# Altium PCB 机器人控制板.PcbDoc
Units mm, origin at the board's own origin, x right, y up, seen from the top; angles counter-clockwise.
Board outline 50.29 x 70.23 mm, 2 copper layers (Top Layer, Bottom Layer); 25 components, 46 nets, 122 pads, 0 vias.
Unrouted connection lines stored in the file: 4.
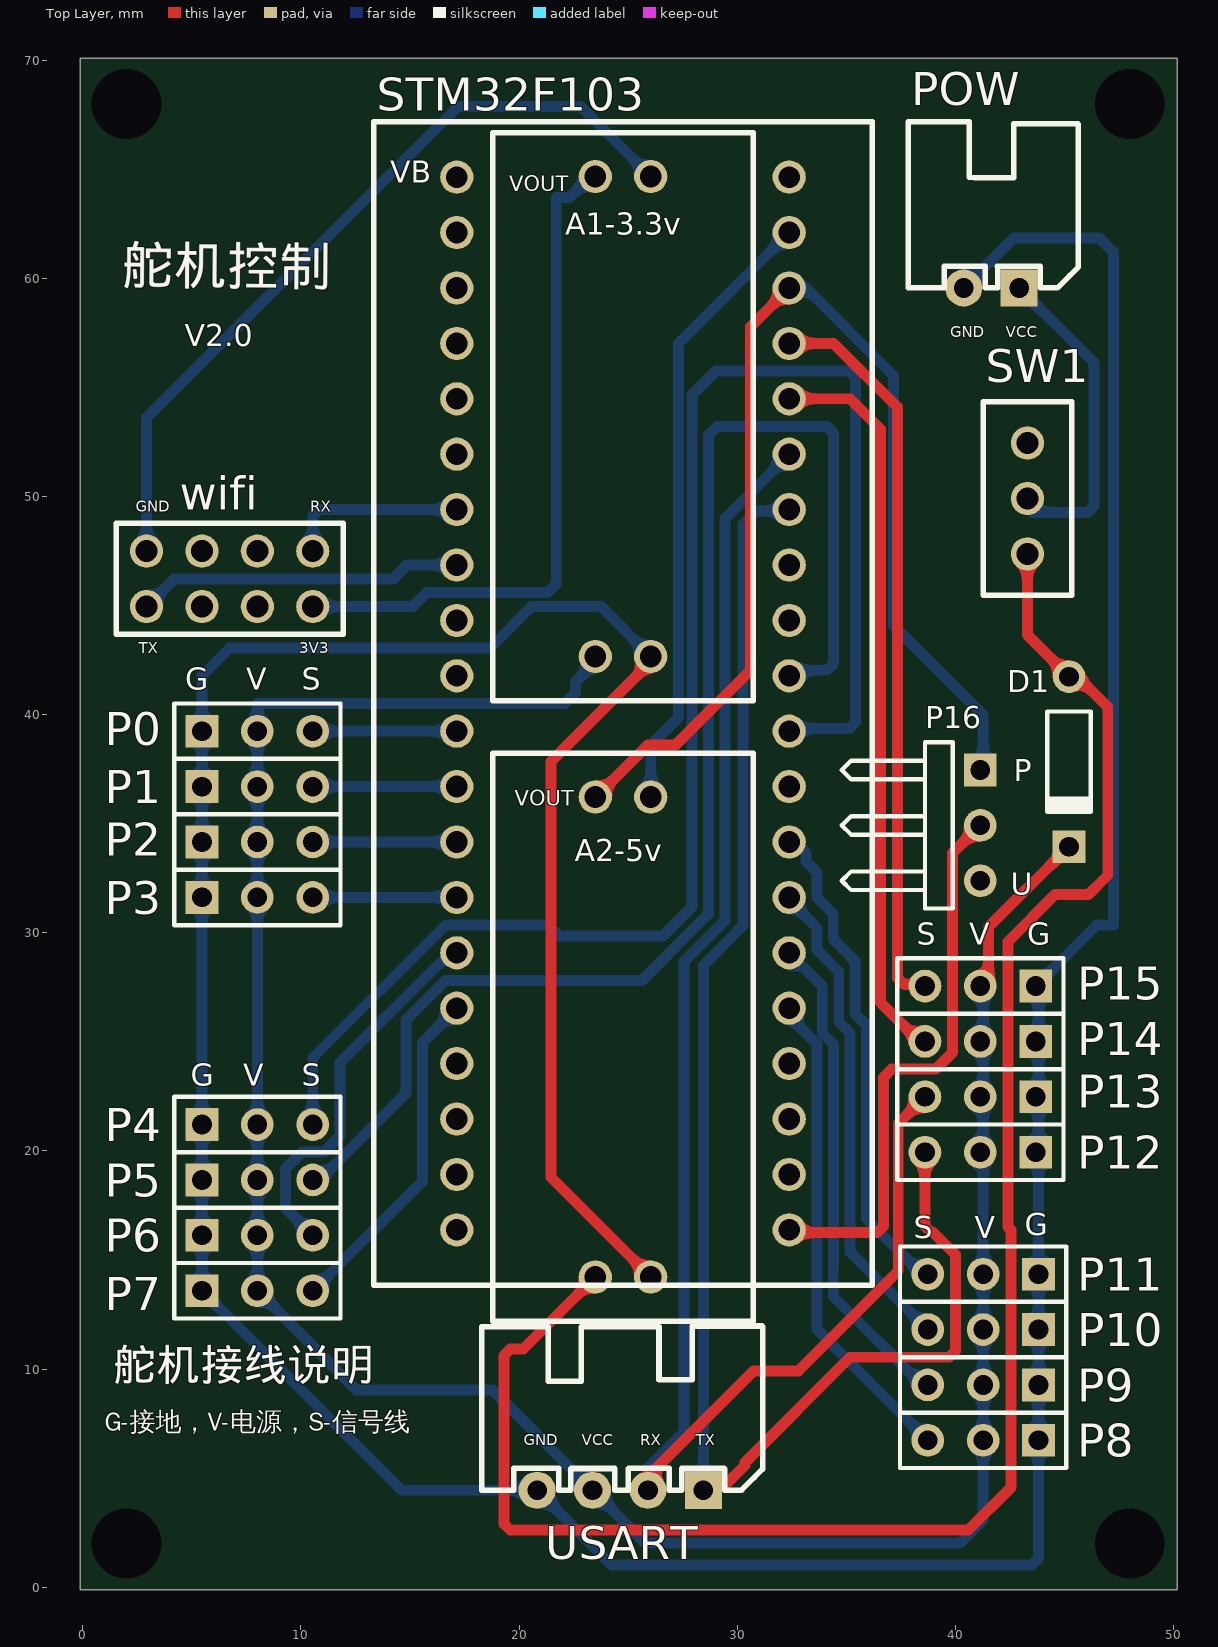
[diagram p0: Top Layer view]
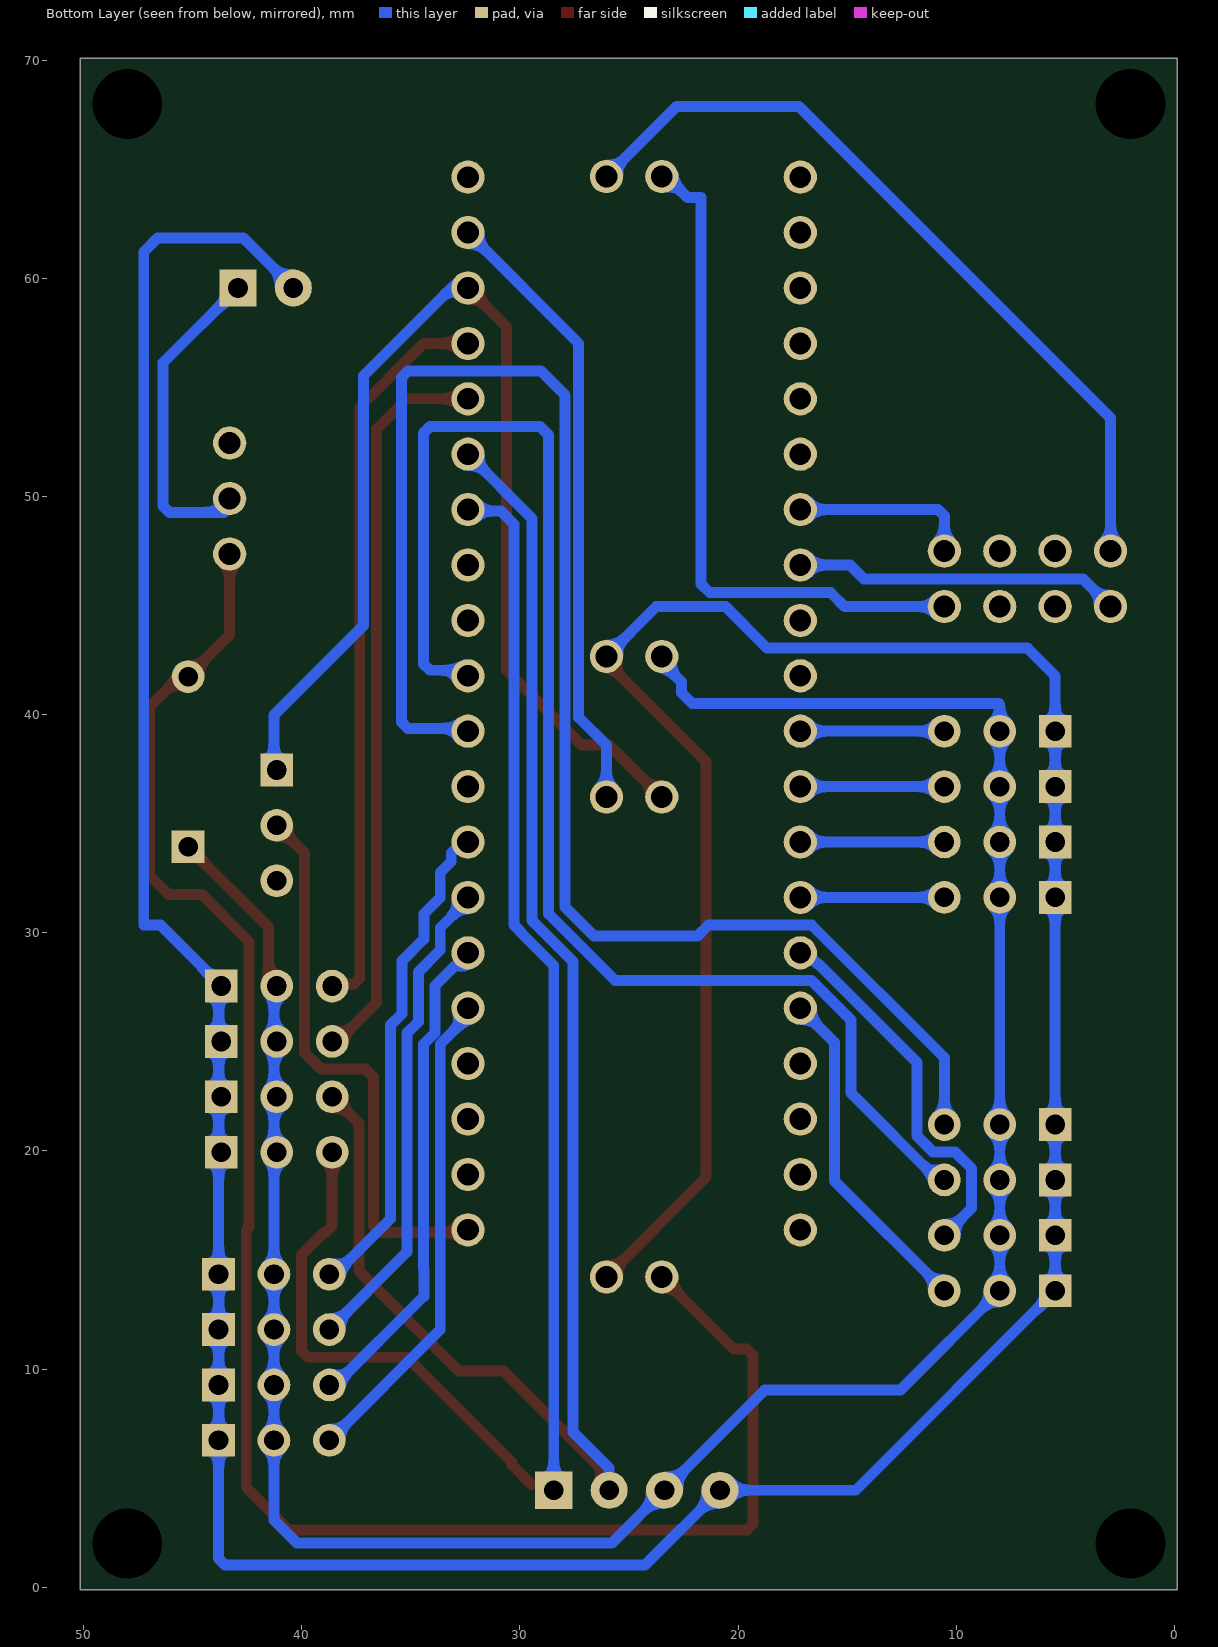
[diagram p1: Bottom Layer view, seen from below]

## Layer stack, top to bottom
Top Solder: solder mask 0.0102, Solder Resist, Dk 3.5
Top Layer: signal copper 0.0356
Dielectric 1: dielectric 0.32, FR-4, Dk 4.8
Bottom Layer: signal copper 0.0356
Bottom Solder: solder mask 0.0102, Solder Resist, Dk 3.5

## Board outline
-0.127,70.104 50.165,70.104 50.165,-0.127 -0.127,-0.127

## Design rules (kind name [scope] priority, off if disabled: settings)
Clearance [All] p1: gap=0 ignorepadtopadclearanceinfootprint=FALSE
ComponentClearance [All] p1: gap=0.1 collisioncheckmode=3 verticalgap=0 showdistances=FALSE
HoleSize [All] p1: absolutevalues=TRUE maxlimit=2.5 minlimit=0.025 maxpercent=80.000 minpercent=20.000
MinimumSolderMaskSliver [All] p1: minsoldermaskwidth=0.127
PolygonConnect [All] p1: connectstyle=Direct reliefconductorwidth=0.254 reliefentries=4 polygonreliefangle="90 Angle" airgapwidth=0.254
RoutingVias [All] p1: holewidth=0.711 width=1.27 viastyle="Through Hole" minholewidth=0.711 minwidth=0.1 maxholewidth=0.711 maxwidth=0.5
SilkToSilkClearance [All] p1: silktosilkclearance=0
SilkToSolderMaskClearance [IsPad] p1: minsilkscreentomaskgap=0 clearancetoexposedcopper=TRUE
SolderMaskExpansion [All] p1: expansion=0.102 istentingtop=FALSE
Width [All] p1: maxlimit=2 minlimit=0.1 preferedwidth=0.5
25 further rules are at their usual default settings.

## Classes and differential pairs
component class 语音控制: LD3322? RELAY? STM?
component class 红外遥控接收器: IR1 JQ8900 RELAY1 STM?
component class 火灾预警系统: FLAMESENSOR? JQ8900? OLED_0.96? RELAY? STM?
component class 人体感应风扇: BODY? RELAY? STM?
component class 机器人控制板: A1-3.3v A2-5v P0 P1 P2 P3 P4 P5 P7 P8 P9 P10 P11 P12 P13 P14 P15 P16 POW SW1 wifi

## Components (designator, comment, footprint, x,y, rotation, side; value= is the part's Value field where it differs from the comment)
A1-3.3v "AMSN17" AMSN17 26.035,42.672 r90 top (schematic designator A1)
A2-5v "AMSN17-5V" AMSN17 26.035,14.224 r90 top (schematic designator A2)
D1 "Diode 1N4738" DO-35A 45.212,37.846 r270 top
P0 "0号舵机" HDR1X3 5.461,39.243 r0 top
P1 "1号舵机" HDR1X3 5.461,36.703 r0 top
P2 "2号舵机" HDR1X3 5.461,34.163 r0 top
P3 "3号舵机" HDR1X3 5.461,31.623 r0 top
P4 "4号舵机" HDR1X3 5.461,21.209 r0 top
P5 "5号舵机" HDR1X3 5.461,18.669 r0 top
P6 "6号舵机" HDR1X3 5.461,16.129 r0 top
P7 "7号舵机" HDR1X3 5.461,13.589 r0 top
P8 "8号舵机" HDR1X3 43.815,6.731 r180 top
P9 "9号舵机" HDR1X3 43.815,9.271 r180 top
P10 "10号舵机" HDR1X3 43.815,11.811 r180 top
P11 "11号舵机" HDR1X3 43.815,14.351 r180 top
P12 "12号舵机" HDR1X3 43.688,19.939 r180 top
P13 "13号舵机" HDR1X3 43.688,22.479 r180 top
P14 "14号舵机" HDR1X3 43.688,25.019 r180 top
P15 "15号舵机" HDR1X3 43.688,27.559 r180 top
P16 "短路帽" HDR1X3H 41.148,37.465 r270 top (schematic designator P6)
POW "HDR-1X2" XH2.54-WI-2P 41.656,59.563 r180 top
STM32F103 "STM32F103C6T6" STM32F103C6T6 17.145,64.643 r270 top (schematic designator STM1)
SW1 "SW-1P" SS12D00 43.307,47.371 r90 top
USART "HDR-1X4" XH2.54-WI-4P 24.638,4.445 r180 top
wifi "ESP001S" ESP001S 2.921,47.498 r270 top

## Footprints (in the part's own frame and the unit in brackets; to place one, negate y for a bottom-side part, rotate by r counter-clockwise, add the part's x,y. Pads: shape width x height; smd on the part's side, far side on the other; paste and mask are expansions set on the pad)
AMSN17 [mil] "变压模块"
  round 60 hole 39.37: 1(0,100) 2(0,0) 3(866.14,0) 4(866.14,100)
  silkscreen extent -80,-185 945,285
DO-35A [mm] "Diode, Axial; Body 4.6 x 1.9 mm (LxDia. max), Lead Dia. 0.53 mm (max)"
  round 1.5 hole 0.9: 1(-3.9,0)
  rect 1.5x1.5 hole 0.9: 2(3.9,0)
  silkscreen extent -2.3,-1 2.4,1
ESP001S [mil] "wifi模块"
  round 60 hole 39.37: 1(0,300) 2(0,200) 3(0,100) 4(0,0) 5(100,300) 6(100,200) 7(100,100) 8(100,0)
  silkscreen extent -50,-55 150,355
HDR1X3 [mm] "Connector; Header; 3 Position"
  rect 1.5x1.5 hole 0.9: 1(0,0)
  round 1.5 hole 0.9: 2(2.54,0) 3(5.08,0)
  silkscreen extent -1.27,-1.27 6.35,1.27
HDR1X3H [mm] "Connector; Header; 3 Position; Right Angle"
  rect 1.5x1.5 hole 0.9: 1(0,0)
  round 1.5 hole 0.9: 2(2.54,0) 3(5.08,0)
  silkscreen extent -1.27,-6.35 6.35,-1.27
SS12D00 [mil] "拨动开关三脚"
  round 60 hole 39.37: 1(0,0) 2(100,0) 3(200,0)
  silkscreen extent -75,-80 275,80
STM32F103C6T6 [mil] "开发板子"
  round 60 hole 39.37: 1(0,0) 2(100,0) 3(200,0) 4(300,0) 5(400,0) 6(500,0) 7(600,0) 8(700,0) 9(800,0) 10(900,0) 11(1000,0) 12(1100,0) 13(1200,0) 14(1300,0) 15(1400,0) 16(1500,0) 17(1600,0) 18(1700,0) 19(1800,0) 20(1900,0) 21(1900,600) 22(1800,600) 23(1700,600) 24(1600,600) 25(1500,600) 26(1400,600) 27(1300,600) 28(1200,600) 29(1100,600) 30(1000,600) 31(900,600) 32(800,600) 33(700,600) 34(600,600) 35(500,600) 36(400,600) 37(300,600) 38(200,600) 39(100,600) 40(0,600)
  silkscreen extent -100,-150 2000,750
XH2.54-WI-2P [mm] "接插件，2P"
  rect 1.7x1.7 hole 0.9: 1(-1.27,0)
  round 1.7 hole 0.9: 2(1.27,0)
  silkscreen extent -3.99,-7.62 3.81,0, body extent -3.77,-7.35 3.77,0.35, height 5.73
XH2.54-WI-4P [mm] "接插件，4P"
  rect 1.7x1.7 hole 0.9: 1(-3.81,0)
  round 1.7 hole 0.9: 2(-1.27,0) 3(1.27,0) 4(3.81,0)
  silkscreen extent -6.53,-7.53 6.35,0, body extent -6.31,-7.35 6.31,0.35, height 5.73

## Part data
A2-5v: library part AMSN17
D1: library part "Diode 1N4149", "Computer Diode", Code_JEDEC=DO-204-AH, ComponentLink1Description="Manufacturer Link", ComponentLink1URL=http://www.national.com/, DatasheetVersion=1989, LatestRevisionDate=17-Jul-2002, LatestRevisionNote="Re-released for DXP Platform.", PackageDescription="Diode, Axial; Body 4.6 x 1.9 mm (LxDia. max), Lead Dia. 0.53 mm (max)", PackageReference=DO-35A, PackageVersion=1989, Published=8-Jun-2000, Publisher="Altium Limited"
P0 P1 P2 P3 P4 P5 P6 P7 P8 P9 P10 P11 P12 P13 P14 P15: library part "Header 3", "Header, 3-Pin", LatestRevisionDate=17-Jul-2002, LatestRevisionNote="Re-released for DXP Platform.", Publisher="Altium Limited"
P16: library part "Header 3H", "Header, 3-Pin, Right Angle", LatestRevisionDate=17-Jul-2002, LatestRevisionNote="Re-released for DXP Platform.", Publisher="Altium Limited"
POW: library part "Header 2", "2P接插件", BOM名称=2P接插件, 版权归属="封装库来自淘宝 ID：黄晶宝石", 联系售后=https://shop463601444.taobao.com
SW1: "1路编码开关", BOM名称=1路编码开关, 学习资源="封装库来自淘宝 ID：黄晶宝石", 技术支持，联系售后=https://shop463601444.taobao.com
USART: library part "Header 4", "4P接插件", BOM名称=4P接插件, 学习资源=https://shop463601444.taobao.com, 版权归属="封装库来自淘宝 ID：黄晶宝石"

## Free pads (board coordinates)
  round 2.524 hole 3.2 unplated: 1(2,2) 2(48,2) 3(48,68) 4(2,68)

## Nets (pads, with @x,y where several pads share a name; then routed paths per layer and width w, separated by ;. In a path a pad name is that pad's centre, name@x,y a point inside that pad or via, vN(x,y) a via of type N, cw(c..) or ccw(c..) an arc to the next point about the centre after c; other vN are vias at no path point)
+5: 
GND: A1-3.3v.2 A2-5v.2 A2-5v.3 P0.1 P1.1 P2.1 P3.1 P4.1 P5.1 P6.1 P7.1 P8.1 P9.1 P10.1 P11.1 P12.1 P13.1 P14.1 P15.1 POW.2 STM32F103.39 USART.4 | length 226.1
  Top Layer w0.5: A2-5v.2 21.463,18.796 21.463,37.846 A1-3.3v.2@26.162,42.545
  Bottom Layer w0.5: P7.1@5.207,13.843 P7.1 ; A2-5v.3 26.035,38.608 27.305,39.878 27.305,57.023 STM32F103.39 ; A1-3.3v.2 23.749,44.958 20.574,44.958 18.665,43.049 6.727,43.049 5.461,41.783 P0.1 P1.1 P2.1 P3.1 P4.1 P5.1 P6.1 P7.1 ; STM32F103.39@32.385,62.23 STM32F103.39@32.893,62.23 ; POW.2 42.672,61.849 46.609,61.849 47.244,61.214 47.244,30.353 46.482,30.353 P15.1 ; P15.1@43.815,27.559 P11.1 P10.1 P9.1 P8.1 43.815,1.309 43.522,1.016 24.257,1.016 USART.4 14.605,4.445 P7.1
NetA1_1: A1-3.3v.1 D1.2 P0.2 P1.2 P2.2 P3.2 P4.2 P5.2 P6.2 P7.2 P8.2 P9.2 P10.2 P11.2 P12.2 P13.2 P14.2 P15.2 USART.3 | length 114.9
  Top Layer w0.5: P15.2 41.529,27.94 41.529,30.263 D1.2
  Bottom Layer w0.5: A1-3.3v.1 23.495,42.395 22.592,41.492 22.592,41.007 22.098,40.513 8.04,40.513 8.001,40.474 P0.2 P1.2 P2.2 P3.2 P4.2 P5.2 P6.2 P7.2 12.554,9.036 18.777,9.036 USART.3 25.781,2.032 40.22,2.032 41.275,3.087 P8.2 P9.2 P10.2 P11.2 P15.2@41.275,27.559 ; P15.2 P15.2@41.148,27.686
NetA1_3: A1-3.3v.3 wifi.4 | length 36.5
  Bottom Layer w0.5: wifi.4 2.921,53.594 17.209,67.882 22.825,67.882 A1-3.3v.3
NetA1_4: A1-3.3v.4 STM32F103.8 wifi.5 wifi.6 wifi.7 wifi.8 | length 46.5
  Bottom Layer w0.5: wifi.8 4.191,46.228 14.224,46.228 14.859,46.863 STM32F103.8 ; wifi.5 15.113,44.958 15.748,45.593 21.297,45.593 21.703,45.999 21.703,63.717 22.312,63.717 23.267,64.672 A1-3.3v.4
NetA2_1: A2-5v.1 D1.1 SW1.1 | length 84.7
  Top Layer w0.5: A2-5v.1 20.193,10.922 19.597,10.922 19.304,10.629 19.304,2.905 19.597,2.612 40.585,2.612 42.545,4.572 42.545,16.383 42.418,16.51 42.418,29.591 44.577,31.75 46.101,31.75 46.99,32.639 46.99,40.347 D1.1@45.51,41.827 ; SW1.1 43.307,43.651 D1.1
NetA2_4: A2-5v.4 P16.1 STM32F103.38 | length 55.1
  Top Layer w0.5: A2-5v.4@23.51,36.21 25.908,38.608 27.178,38.608 30.607,42.037 30.607,57.785 STM32F103.38
  Bottom Layer w0.5: STM32F103.38 33.147,59.563 37.172,55.538 37.172,44.081 41.275,39.978 41.275,37.084 41.148,36.957 P16.1
NetB?_2: 
NetBODY?_2: 
NetD1_1: 
NetD?_2: 
NetFLAMESENSOR?_4: 
NetIR1_3: 
NetJQ8900?_7: 
NetJQ8900?_8: 
NetJQ8900?_15: 
NetJQ8900_7: 
NetJQ8900_8: 
NetJQ8900_14: 
NetJQ8900_15: 
NetLD3322?_3: 
NetLD3322?_4: 
NetLD3322?_5: 
NetOLED_0.96?_3: 
NetOLED_0.96?_4: 
NetP0_3: P0.3 STM32F103.11 | length 6.6
  Bottom Layer w0.5: P0.3 STM32F103.11
NetP1_3: P1.3 STM32F103.12 | length 7.1
  Bottom Layer w0.5: P1.3@10.033,36.703 P1.3 STM32F103.12
NetP2_3: P2.3 STM32F103.13 | length 6.6
  Bottom Layer w0.5: P2.3 STM32F103.13
NetP3_3: P3.3 STM32F103.14 | length 6.6
  Bottom Layer w0.5: P3.3 STM32F103.14
NetP4_3: P4.3 STM32F103.30 | length 74.2
  Bottom Layer w0.5: P4.3 10.541,24.269 16.621,30.349 21.363,30.349 21.859,29.853 26.601,29.853 27.932,31.184 27.932,54.649 29.036,55.753 35.14,55.753 35.433,55.46 35.433,39.663 35.14,39.37 STM32F103.30@32.385,39.37
NetP5_3: P5.3 STM32F103.31 | length 66.1
  Bottom Layer w0.5: P5.3 P5.3@10.812,18.669 ; P5.3@10.691,18.519 14.821,22.649 14.821,26.009 16.629,27.817 25.632,27.817 28.686,30.871 28.686,52.816 29.083,53.213 34.124,53.213 34.417,52.92 34.417,42.33 34.124,42.037 STM32F103.31@32.385,42.037
NetP6_2: P16.2 STM32F103.21 | length 25.8
  Top Layer w0.5: STM32F103.21@32.385,16.256 36.41,16.256 36.703,16.549 36.703,23.368 37.084,23.749 39.116,23.749 39.878,24.511 39.878,33.655 P16.2
NetP6_3: P6.3 STM32F103.15 | length 17.5
  Bottom Layer w0.5: P6.3 9.287,17.383 9.287,19.188 10.054,19.955 11.06,19.955 11.795,20.69 11.795,24.05 16.316,28.571 16.356,28.571 16.868,29.083 STM32F103.15
NetP7_3: P7.3 STM32F103.16 | length 15.7
  Bottom Layer w0.5: P7.3 15.575,18.623 15.575,24.973 STM32F103.16
NetP8_3: P8.3 STM32F103.25 | length 22.7
  Bottom Layer w0.5: STM32F103.25@32.581,26.347 STM32F103.25 32.385,26.162 33.651,24.896 33.651,11.815 P8.3
NetP9_3: P9.3 STM32F103.26 | length 22.2
  Bottom Layer w0.5: STM32F103.26@32.535,28.484 32.984,28.484 33.901,27.567 33.901,25.408 34.417,24.892 34.417,14.605 34.405,14.593 34.405,13.335 38.469,9.271 P9.3
NetP10_3: P10.3 STM32F103.27 | length 22.4
  Bottom Layer w0.5: STM32F103.27@32.322,31.559 33.651,30.23 33.651,29.214 34.655,28.21 34.655,25.924 35.171,25.408 35.171,15.375 P10.3
NetP11_3: P11.3 STM32F103.28 | length 22.7
  Bottom Layer w0.5: STM32F103.28@32.512,34.29 33.147,33.655 33.147,33.274 33.651,32.77 33.651,31.623 34.405,30.869 34.405,29.718 35.409,28.714 35.409,26.289 35.925,25.773 35.925,16.891 38.465,14.351 P11.3
NetP14_3: P14.3 STM32F103.36 | length 34.1
  Top Layer w0.5: STM32F103.36@32.297,54.571 STM32F103.36 ; STM32F103.36@32.385,54.61 STM32F103.36 ; P14.3 38.354,25.019 36.576,26.797 36.576,53.086 35.179,54.483 STM32F103.36
NetP15_3: P15.3 STM32F103.37 | length 33.9
  Top Layer w0.5: STM32F103.37@32.5,56.908 STM32F103.37 34.417,57.023 37.342,54.098 37.342,27.936 37.635,27.643 38.524,27.643 P15.3
NetRELAY1_3: 
NetRELAY?_3: 
NetSTM1_7: STM32F103.7 wifi.1 | length 8.3
  Bottom Layer w0.5: wifi.1 10.541,49.11 10.834,49.403 STM32F103.7
RX: P13.3 STM32F103.35 USART.2 | length 74.7
  Top Layer w0.5: USART.2 25.908,5.08 30.744,9.916 32.802,9.916 37.384,14.499 37.384,21.255 P13.3
  Bottom Layer w0.5: USART.2 25.908,5.461 27.559,7.112 27.559,28.678 29.44,30.559 29.44,48.998 STM32F103.35
TX: P12.3 STM32F103.34 USART.1 | length 70.3
  Top Layer w0.5: 29.464,4.699 30.353,5.588 30.353,5.715 35.179,10.541 39.712,10.541 40.005,10.834 40.005,15.24 38.989,16.256 38.901,16.256 38.608,16.549 P12.3
  Bottom Layer w0.5: USART.1 28.448,28.501 29.972,30.025 29.972,30.06 30.265,30.353 30.265,48.729 30.873,49.337 32.319,49.337 STM32F103.34
VCC: POW.1 SW1.2 | length 14.3
  Bottom Layer w0.5: POW.1 46.355,56.134 46.355,49.569 46.062,49.276 SW1.2@43.561,49.276
pads on no net: P16.3 STM32F103.1 STM32F103.2 STM32F103.3 STM32F103.4 STM32F103.5 STM32F103.6 STM32F103.9 STM32F103.10 STM32F103.17 STM32F103.18 STM32F103.19 STM32F103.20 STM32F103.22 STM32F103.23 STM32F103.24 STM32F103.29 STM32F103.32 STM32F103.33 STM32F103.40 SW1.3 wifi.2 wifi.3

## Silkscreen, mask and mechanical layers (free items; w line width, h text height)
Top Overlay:
  text "VB" at 14.093,64.385 h1
  text "VOUT" at 19.558,64.008 h0.7
  text "舵机控制" at 1.778,59.182 h3 r359.6
  text "GND" at 39.774,57.3 h0.5
  text "VCC" at 42.314,57.3 h0.5
  text "V2.0" at 4.662,56.896 h1
  text "GND" at 2.436,49.299 h0.5
  text "RX" at 10.437,49.299 h0.5
  text "TX" at 2.563,42.822 h0.5
  text "3V3" at 9.929,42.822 h0.5
  text "G" at 4.699,41.148 h1
  text "V" at 7.493,41.148 h1
  text "S" at 10.033,41.148 h1
  text "P" at 42.672,36.957 h1
  text "VOUT" at 19.812,35.814 h0.7
  text "U" at 42.545,31.75 h1
  text "S" at 38.227,29.464 h1
  text "V" at 40.64,29.464 h1
  text "G" at 43.307,29.464 h1
  text "G" at 4.953,22.987 h1
  text "V" at 7.366,22.987 h1
  text "S" at 10.033,22.987 h1
  text "G" at 43.18,16.129 h1
  text "S" at 38.1,16.002 h1
  text "V" at 40.894,16.002 h1
  text "舵机接线说明" at 1.397,8.994 h2.5
  text "G-接地，V-电源，S-信号线" at 1.016,6.865 h1.5
  text "GND" at 20.216,6.5 h0.5
  text "VCC" at 22.883,6.5 h0.5
  text "RX" at 25.55,6.5 h0.5
  text "TX" at 28.09,6.5 h0.5
Mechanical 1:
  lines w0.254: 0,0 0,69.977 50.038,69.977 50.038,0 0,0